# Altium PCB micro8051.PcbDoc (part 1 of 2)
Units mm, origin at the board's own origin, x right, y up, seen from the top; angles counter-clockwise.
Board outline 37 x 60 mm, 2 copper layers (Top Layer, Bottom Layer); 67 components, 71 nets, 314 pads, 101 vias.
Unrouted connection lines stored in the file: 2.
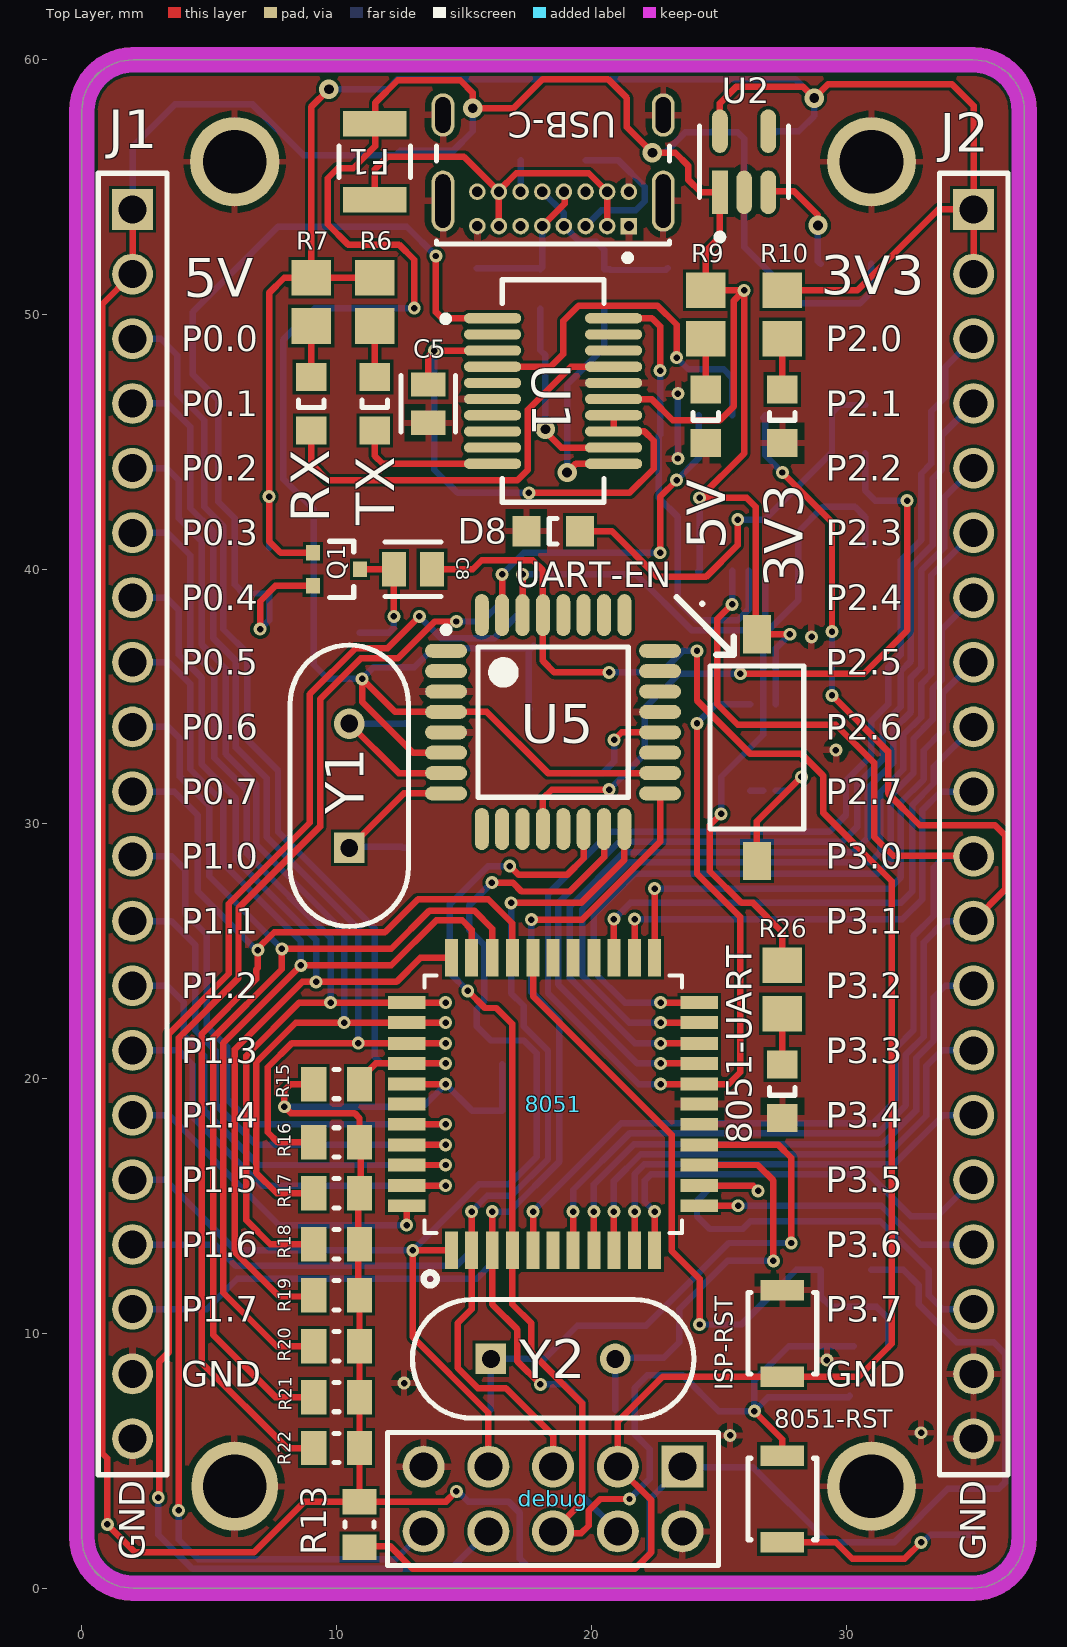
[diagram p0: Top Layer view]
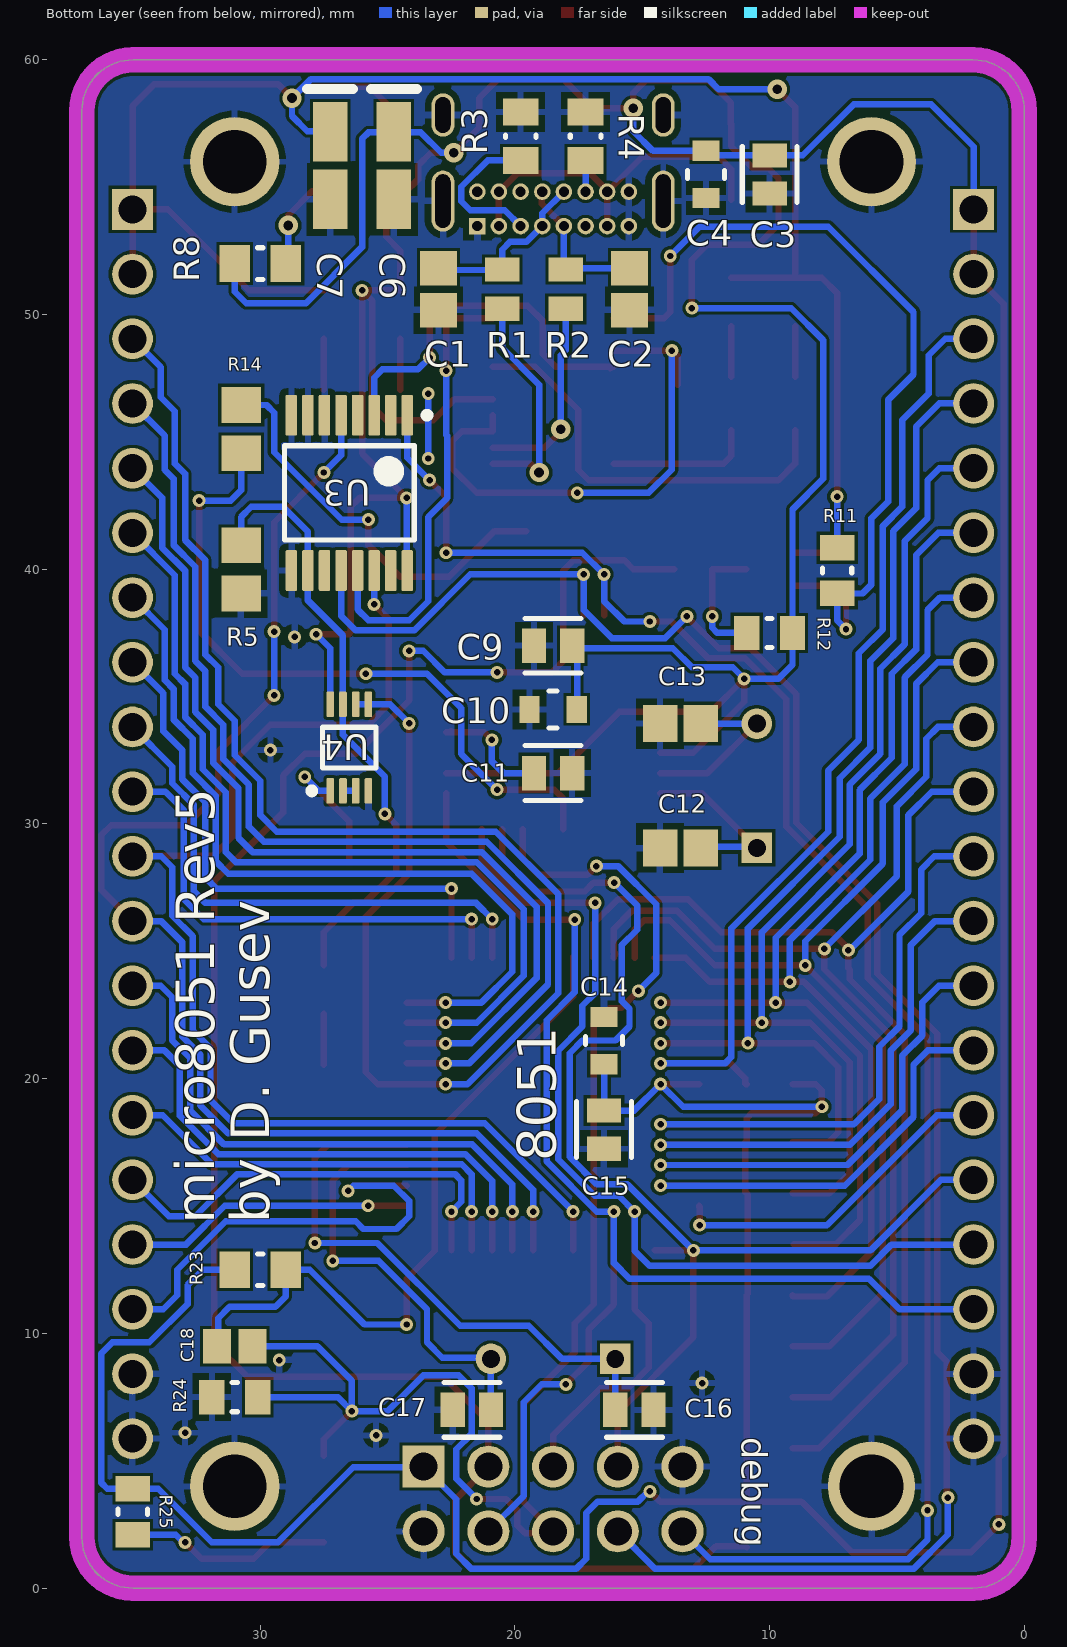
[diagram p1: Bottom Layer view, seen from below]
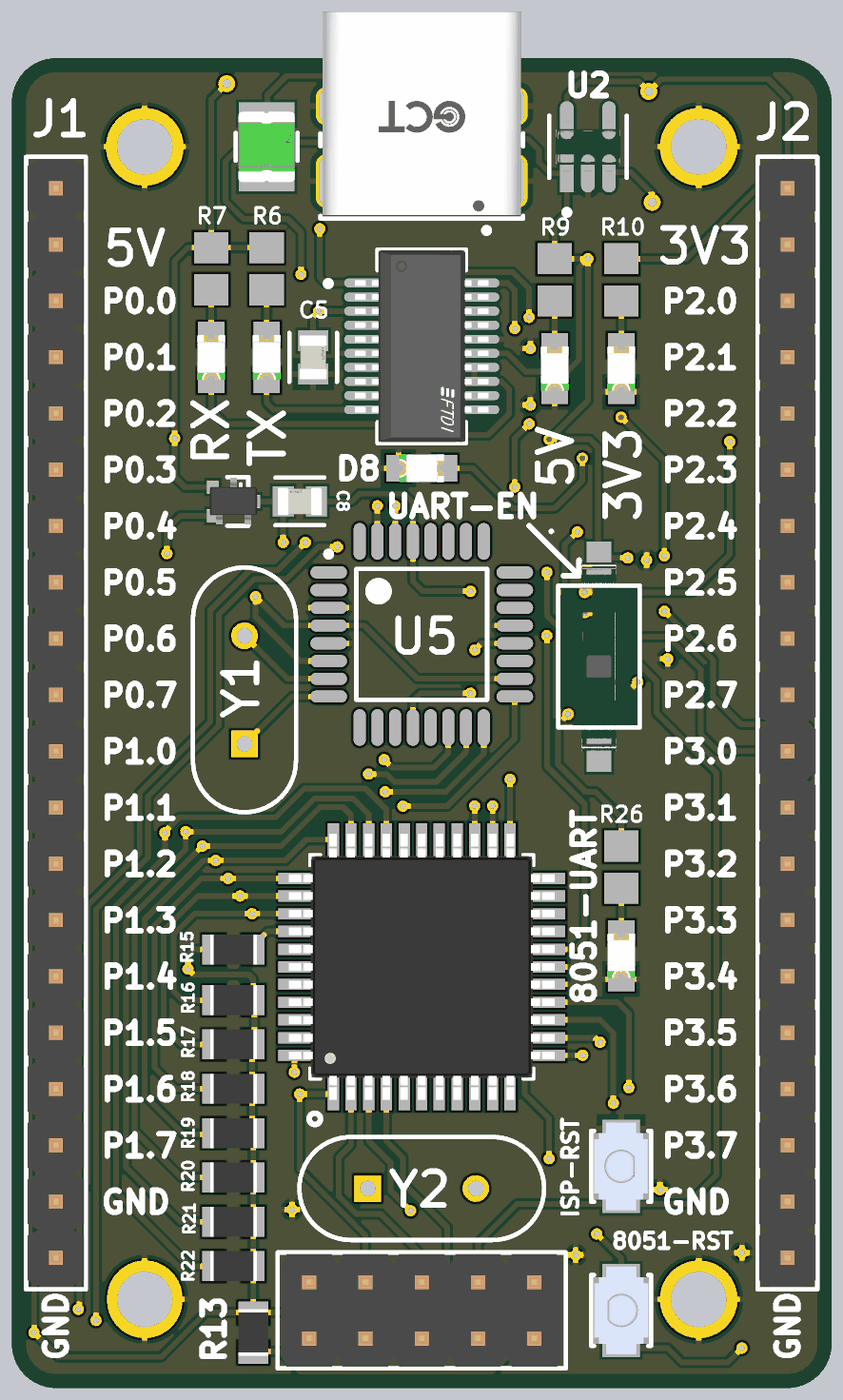
[diagram p2: 3D render of the assembled board from above, using the file's embedded part models]
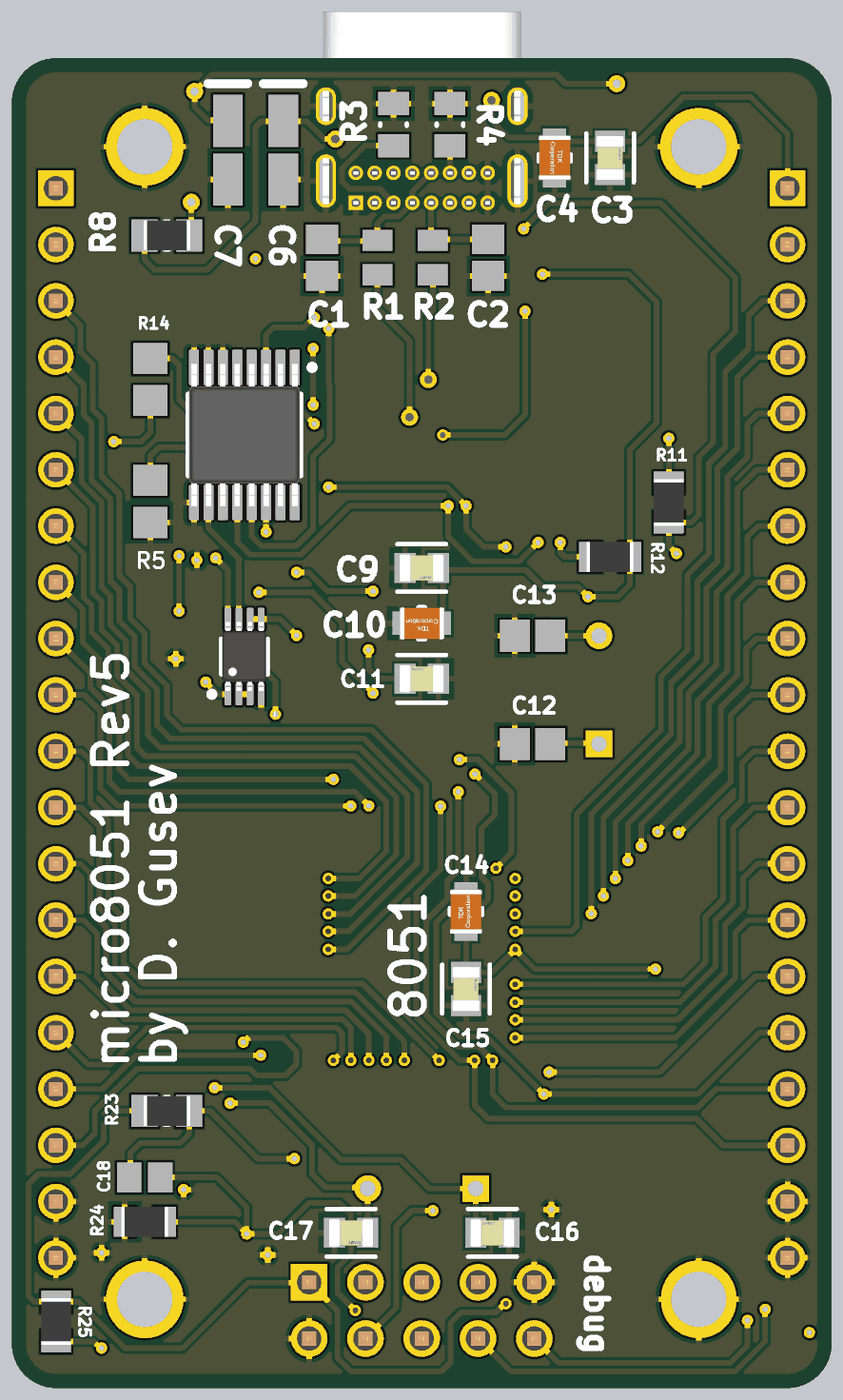
[diagram p3: 3D render of the assembled board from below, using the file's embedded part models]

## Layer stack, top to bottom
Top Solder: solder mask 0.0102, Solder Resist, Dk 3.5
Top Layer: signal copper 0.0356
Dielectric 1: dielectric 0.32, FR-4, Dk 4.8
Bottom Layer: signal copper 0.0356
Bottom Solder: solder mask 0.0102, Solder Resist, Dk 3.5

## Board outline
35,60 cw(c35,58) 37,58 37,2 cw(c35,2) 35,0 2,0 cw(c2,2) 0,2 0,58 cw(c2,58) 2,60

## Design rules (kind name [scope] priority, off if disabled: settings)
Clearance [All] p1: gap=0.127 ignorepadtopadclearanceinfootprint=FALSE except(0: Arc-Hole Track-Hole SMDPad-SMDPad SMDPad-Hole THPad-Hole Via-Hole Fill-Hole Poly-Hole Region-Hole Text-Hole)
PolygonConnect [All] p1: connectstyle=Relief reliefconductorwidth=0.254 reliefentries=4 polygonreliefangle="90 Angle" airgapwidth=0.254
RoutingVias [All] p1: holewidth=0.711 width=1.27 viastyle="Through Hole" minholewidth=0.711 minwidth=1.27 maxholewidth=0.711 maxwidth=1.27
SolderMaskExpansion [All] p1: expansion=0.102 istentingtop=FALSE
Width [All] p1: maxlimit=0.254 minlimit=0.254 preferedwidth=0.254
30 further rules are at their usual default settings.

## Classes and differential pairs
component class USB: 3V3 5V 8051-UART C1 C2 C3 C4 C5 C6 C7 C8 F1 Q1 R1 R2 R3 R4 R5 R6 R7 R8 R9 R10 R11 R12 R26 RX TX U1 U2 U3 U4 UART-EN USB-C
component class micro8051: 8051 8051-RST C14 C15 C16 C17 C18 J1 J2 R15 R16 R17 R18 R19 R20 R21 R22 R23 R24 R25 Y2
component class ISP: C9 C10 C11 C12 C13 D8 debug R13 R14 U5 Y1

## Components (designator, comment, footprint, x,y, rotation, side; value= is the part's Value field where it differs from the comment)
3V3 "150080GS75000" 0805_A 27.5,46 r90 top
5V "150080GS75000" 0805_A 24.5,46 r90 top
8051 "AT89S52-24AUR" AT89S52-24AUR 18.5,19 r90 top
8051-RST "B3U-1000P" FP-B3U-1000P-MFG 27.5,3.5 r90 top
8051-UART "150080SS75000" 0805_A 27.5,19.5 r90 top
C1 "47pF 50V 0805" CAPC2013X71X50NL20T25 23,51 r90 bottom
C2 "47pF 50V 0805" CAPC2013X71X50NL20T25 15.5,51 r90 bottom
C3 "100nF 50V 0805" FP-C0805C-DN-MFG 10,55.5 r270 bottom value="0.10 μF"
C4 "4.7uF 50V 0805" FP-C2012-125-MFG 12.5,55.5 r270 bottom value=4.7uF
C5 "100nF 50V 0805" FP-C0805C-DN-MFG 13.6,46.5 r270 top value="0.10 μF"
C6 "10uF 16V 1206" KEMT-A-3216-18-2_M 24.75,55.85 r270 bottom
C7 "10uF 16V 1206" KEMT-A-3216-18-2_M 27.25,55.85 r270 bottom
C8 "100nF 50V 0805" FP-C0805C-DN-MFG 13,40 r0 top value="0.10 μF"
C9 "100nF 50V 0805" FP-C0805C-DN-MFG 18.5,37 r0 bottom value="0.10 μF"
C10 "4.7uF 50V 0805" FP-C2012-125-MFG 18.5,34.5 r0 bottom value=4.7uF
C11 "100nF 50V 0805" FP-C0805C-DN-MFG 18.5,32 r180 bottom value="0.10 μF"
C12 "22pF 200V 0805" CAPC2013X115X51NL20T26 13.5,29.06 r180 bottom
C13 "22pF 200V 0805" CAPC2013X115X51NL20T26 13.5,33.94 r180 bottom
C14 "4.7uF 50V 0805" FP-C2012-125-MFG 16.5,21.5 r90 bottom value=4.7uF
C15 "100nF 50V 0805" FP-C0805C-DN-MFG 16.5,18 r270 bottom value="0.10 μF"
C16 "33pF 100V 0805" FP-C0805C-DN-MFG 15.31,7 r180 bottom value="33 pF"
C17 "33pF 100V 0805" FP-C0805C-DN-MFG 21.69,7 r0 bottom value="33 pF"
C18 "1uF 25V 0805" CAPC2013X140X50LL20T25 31,9.5 r180 bottom
D8 "150080BS75000" 0805_A 18.5,41.5 r0 top
debug "61301021121" 61301021121 18.5,3.5 r180 top
F1 "MICROSMD050F-2" FP-microSMD-MFG 11.5,56 r90 top value=0.25-0.9Ω
ISP-RST "B3U-1000P" FP-B3U-1000P-MFG 27.5,10 r270 top
J1 "61302011121" 61302011121 1.99,30 r270 top
J2 "61302011121" 61302011121 35.01,30 r270 top
Q1 "2N7002PW,115" FP-SOT323-MFG 10,40 r0 top
R1 "22R 1% 0805" RESC2013X70X40LL20T20 20.5,51 r270 bottom
R2 "22R 1% 0805" RESC2013X70X40LL20T20 18,51 r270 bottom
R3 "5K11 1% 0805" RESC0805(2012)_N 19.775,57 r270 bottom value="5110.00 Ohm"
R4 "5K11 1% 0805" RESC0805(2012)_N 17.225,57 r270 bottom value="5110.00 Ohm"
R5 "1K 1% 0805" RESC2013X60X40ML20T25 30.75,40 r270 bottom
R6 "1K 1% 0805" RESC2013X60X40ML20T25 11.5,50.5 r270 top
R7 "1K 1% 0805" RESC2013X60X40ML20T25 9,50.5 r270 top
R8 "100K 1% 0805" RESC2013X60X35ML10T20 30,52 r0 bottom
R9 "1K 1% 0805" RESC2013X60X40ML20T25 24.5,50 r90 top
R10 "1K 1% 0805" RESC2013X60X40ML20T25 27.5,50 r90 top
R11 "10K 1% 0805" RESC2013X60X35NL10T20 7.35,39.95 r90 bottom
R12 "10K 1% 0805" RESC2013X60X35NL10T20 10,37.5 r180 bottom
R13 "10K 1% 0805" RESC2013X60X35NL10T20 10.9,2.5 r90 top
R14 "1K 1% 0805" RESC2013X60X40ML20T25 30.75,45.5 r270 bottom
R15 "10K 1% 0805" RESC2013X60X35NL10T20 10,19.787 r180 top
R16 "10K 1% 0805" RESC2013X60X35NL10T20 10,17.5 r0 top
R17 "10K 1% 0805" RESC2013X60X35NL10T20 10,15.5 r0 top
R18 "10K 1% 0805" RESC2013X60X35NL10T20 10,13.5 r0 top
R19 "10K 1% 0805" RESC2013X60X35NL10T20 10,11.5 r0 top
R20 "10K 1% 0805" RESC2013X60X35NL10T20 10,9.5 r0 top
R21 "10K 1% 0805" RESC2013X60X35NL10T20 10,7.5 r0 top
R22 "10K 1% 0805" RESC2013X60X35NL10T20 10,5.5 r0 top
R23 "100R 1% 0805" RESC2013X60X35ML10T20 30,12.5 r0 bottom
R24 "10K 1% 0805" RESC2013X60X35NL10T20 31,7.5 r180 bottom
R25 "10K 1% 0805" RESC2013X60X35NL10T20 35,3 r90 bottom
R26 "1K 1% 0805" RESC2013X60X40ML20T25 27.5,23.5 r270 top
RX "150080YS75000" 0805_A 9,46.5 r90 top
TX "150080YS75000" 0805_A 11.5,46.5 r90 top
U1 "FT231XS-R" FP-SSOP-20-MFG 18.5,47 r0 top
U2 "AP2112K-3.3TRG1" FP-SOT25-IPC_A 26,56 r90 top
U3 "SN74LV4052APWR" PW0016A_M 26.5,43 r270 bottom
U4 "SN74LVC2G08DCUR" DCU0008A_M 26.5,33 r90 bottom
U5 "ATmega328P-AN" 32A_N 18.5,34 r0 top
UART-EN "A6S-1104-H" FP-A6S-1104-H-MFG 26.5,33 r180 top
USB-C "USB4085-GF-A" FP-USB4085-GF-A-MFG 18.5,57.5 r180 top
Y1 "49S/18PF" JPY-49S-18PF 10.5,31.5 r90 top
Y2 "49S/18PF" JPY-49S-18PF 18.5,9 r0 top

## Footprints (in the part's own frame and the unit in brackets; to place one, negate y for a bottom-side part, rotate by r counter-clockwise, add the part's x,y. Pads: shape width x height; smd on the part's side, far side on the other; paste and mask are expansions set on the pad)
32A_N [mm] "Thin QFP, 32-Leads, Body 7x7mm, Pitch 0.8mm, IPC Medium Density"
  oval 1.65x0.55 smd: 1(-4.2,2.8) 2(-4.2,2) 3(-4.2,1.2) 4(-4.2,0.4) 5(-4.2,-0.4) 6(-4.2,-1.2) 7(-4.2,-2) 8(-4.2,-2.8) 17(4.2,-2.8) 18(4.2,-2) 19(4.2,-1.2) 20(4.2,-0.4) 21(4.2,0.4) 22(4.2,1.2) 23(4.2,2) 24(4.2,2.8)
  oval 0.55x1.65 smd: 9(-2.8,-4.2) 10(-2,-4.2) 11(-1.2,-4.2) 12(-0.4,-4.2) 13(0.4,-4.2) 14(1.2,-4.2) 15(2,-4.2) 16(2.8,-4.2) 25(2.8,4.2) 26(2,4.2) 27(1.2,4.2) 28(0.4,4.2) 29(-0.4,4.2) 30(-1.2,4.2) 31(-2,4.2) 32(-2.8,4.2)
  silkscreen extent -4.32,-2.95 2.95,3.75, body extent -3.5,-3.5 3.5,3.5, height 1.2
0805_A [mm] "Chip LED, 2-Leads, Body 2.0x1.3mm, IPC Medium Density"
  rect 1.1x1.2 smd: 1(-1.05,0) 2(1.05,0)
  silkscreen extent -0.15,-0.5 0.15,0.5, body extent -1,-0.62 1,0.63, height 0.68
61301021121 [mm] "Pin Header, pitch 2.54 mm, THT, Vertical, dual row, 10p"
  rect 1.65x1.65 hole 1.1: 1(-5.08,-1.27)
  round 1.65 hole 1.1: 2(-5.08,1.27) 3(-2.54,-1.27) 4(-2.54,1.27) 5(0,-1.27) 6(0,1.27) 7(2.54,-1.27) 8(2.54,1.27) 9(5.08,-1.27) 10(5.08,1.27)
  silkscreen extent -6.5,-2.62 6.5,2.62, body extent -6.35,-2.54 6.35,2.54, height 8.59
61302011121 [mm] "Pin Header, pitch 2.54 mm, THT, Vertical, single row, 20p"
  rect 1.6x1.6 hole 1.1: 1(-24.13,0)
  round 1.6 hole 1.1: 2(-21.59,0) 3(-19.05,0) 4(-16.51,0) 5(-13.97,0) 6(-11.43,0) 7(-8.89,0) 8(-6.35,0) 9(-3.81,0) 10(-1.27,0) 11(1.27,0) 12(3.81,0) 13(6.35,0) 14(8.89,0) 15(11.43,0) 16(13.97,0) 17(16.51,0) 18(19.05,0) 19(21.59,0) 20(24.13,0)
  silkscreen extent -25.55,-1.35 25.55,1.35, body extent -25.4,-1.27 25.4,1.27, height 8.57
AT89S52-24AUR [mil]
  rect 58x20 smd: 1(-226,157) 2(-226,126) 3(-226,94) 4(-226,63) 5(-226,31) 6(-226,0) 7(-226,-31) 8(-226,-63) 9(-226,-94) 10(-226,-126) 11(-226,-157) 23(226,-157) 24(226,-126) 25(226,-94) 26(226,-63) 27(226,-31) 28(226,0) 29(226,31) 30(226,63) 31(226,94) 32(226,126) 33(226,157)
  rect 20x58 smd: 12(-157,-226) 13(-126,-226) 14(-94,-226) 15(-63,-226) 16(-31,-226) 17(0,-226) 18(31,-226) 19(63,-226) 20(94,-226) 21(126,-226) 22(157,-226) 34(157,226) 35(126,226) 36(94,226) 37(63,226) 38(31,226) 39(0,226) 40(-31,226) 41(-63,226) 42(-94,226) 43(-126,226) 44(-157,226)
  silkscreen extent -280,-199 199,200, body extent -236,-236 236,236, height 43
CAPC2013X71X50NL20T25 [mm] "Chip Capacitor, 2-Leads, Body 2.01x1.25mm, IPC Medium Density"
  rect 1.35x1.45 smd: 1(-0.825,0) 2(0.825,0)
  body extent -1.1,-0.72 1.11,0.72, height 0.71
CAPC2013X115X51NL20T26 [mm] "Chip Capacitor, 2-Leads, Body 2.01x1.25mm, IPC Medium Density"
  rect 1.35x1.45 smd: 1(-0.8,0) 2(0.8,0)
  body extent -1.11,-0.72 1.1,0.72, height 1.15
CAPC2013X140X50LL20T25 [mm] "Chip Capacitor, 2-Leads, Body 2.00x1.25mm, IPC High Density"
  rect 1.1x1.35 smd: 1(-0.7,0) 2(0.7,0)
  body extent -1.1,-0.72 1.1,0.72, height 1.4
DCU0008A_M [mm] "SOP, 8-Leads, Body 2.4x2.1mm, Pitch 0.5mm, IPC Low Density"
  rrect33% 1x0.3 smd: 1(-1.7,0.75) 2(-1.7,0.25) 3(-1.7,-0.25) 4(-1.7,-0.75) 5(1.7,-0.75) 6(1.7,-0.25) 7(1.7,0.25) 8(1.7,0.75)
  silkscreen extent -1.82,-1.05 0.8,1.6, body extent -1.56,-1 1.56,1, height 0.9
FP-A6S-1104-H-MFG [mm]
  rect 1.1x1.5 smd paste+0 mask+0: 1(0,-4.45) 2(0,4.45)
  silkscreen extent -1.84,-3.2 1.84,3.2, body extent -1.94,-5.3 1.94,5.3, height 0.25
FP-B3U-1000P-MFG [mm]
  rect 0.8x1.7 smd paste+0 mask+0: 1(-1.7,0) 2(1.7,0)
  silkscreen extent -1.6,-1.35 1.6,1.35, body extent -2.2,-1.45 2.2,1.45, height 0.25
FP-C0805C-DN-MFG [mm]
  rect 0.95x1.35 smd paste+0 mask+0: 1(-0.75,0) 2(0.75,0)
  silkscreen extent -1.1,-1.07 1.1,1.07, body extent -1,-0.63 1,0.62, height 0.88
FP-C2012-125-MFG [mm]
  rect 0.8x1.05 smd paste+0 mask+0: 1(-0.925,0) 2(0.925,0)
  silkscreen extent -0.15,-0.72 0.15,0.72, body extent -1.01,-0.72 0.99,0.73, height 1.45
FP-microSMD-MFG [mm]
  rect 1x2.5 smd paste+0 mask+0: 1(-1.5,0) 2(1.5,0)
  silkscreen extent -0.63,-1.4 0.63,1.4, body extent -2.1,-1.5 2.1,1.5, height 0.25
FP-SOT25-IPC_A [mm]
  rect 1.707x0.616 smd paste+0 mask+0: 1(-1.201,0.95)
  rrect100% 1.707x0.616 smd paste+0 mask+0: 2(-1.201,0) 3(-1.201,-0.95) 4(1.201,-0.95) 5(1.201,0.95)
  silkscreen extent -3.08,-1.75 1.4,1.75, body extent -2.55,-2 2.55,2, height 0.25
FP-SOT323-MFG [mm]
  rect 0.55x0.6 smd paste-1000 mask+0: 1(-0.925,0.65) 2(-0.925,-0.65) 3(0.925,0)
  silkscreen extent -0.28,-1.1 0.67,1.1, body extent -1.33,-1.2 1.33,1.2, height 0.25
FP-SSOP-20-MFG [mm]
  rrect100% 2.25x0.4 smd paste+0 mask+0: 1(-2.375,2.857) 2(-2.375,2.222) 3(-2.375,1.587) 4(-2.375,0.953) 5(-2.375,0.318) 6(-2.375,-0.318) 7(-2.375,-0.953) 8(-2.375,-1.587) 9(-2.375,-2.222) 10(-2.375,-2.857) 11(2.375,-2.857) 12(2.375,-2.222) 13(2.375,-1.587) 14(2.375,-0.953) 15(2.375,-0.318) 16(2.375,0.318) 17(2.375,0.953) 18(2.375,1.587) 19(2.375,2.222) 20(2.375,2.857)
  silkscreen extent -4.34,-4.37 1.99,4.37, body extent -3.6,-4.62 3.6,4.62, height 0.25
FP-USB4085-GF-A-MFG [mm]
  rrect100% 0.9x2.4 hole 2.1 slot 0.6 at 0 deg paste-1000 mask+0: 1(-4.325,3.045) 2(4.325,3.045)
  rrect100% 0.9x1.7 hole 1.4 slot 0.6 at 0 deg paste-1000 mask+0: 3(-4.325,-0.335) 4(4.325,-0.335)
  rect 0.65x0.65 hole 0.4 paste-1000 mask+0: A1(-2.975,4.025)
  round 0.65 hole 0.4 paste-1000 mask+0: A4(-2.125,4.025) A5(-1.275,4.025) A6(-0.425,4.025) A7(0.425,4.025) A8(1.275,4.025) A9(2.125,4.025) A12(2.975,4.025) B1(2.975,2.675) B4(2.125,2.675) B5(1.275,2.675) B6(0.425,2.675) B7(-0.425,2.675) B8(-1.275,2.675) B9(-2.125,2.675) B12(-2.975,2.675)
  silkscreen extent -4.57,0.89 4.57,5.39, body extent -4.87,-4.83 4.87,4.83, height 0.25
JPY-49S-18PF [mm] "THD, 2-Leads, Body 11.05x4.65mm, Pitch 4.88mm"
  rect 1.2x1.2 hole 0.7: 1(-2.44,0)
  round 1.2 hole 0.7: 2(2.44,0)
  silkscreen extent -5.53,-2.32 5.53,2.32, body extent -5.52,-2.32 5.53,2.33, height 3.5
KEMT-A-3216-18-2_M [mm] "Molded TAN Capacitor, 2-Leads, Body 3.4x1.8mm, IPC Low Density"
  rect 2.35x1.35 smd: 1(-1.325,0) 2(1.325,0)
  silkscreen extent -3,-0.9 -3,0.9, body extent -1.7,-0.9 1.7,0.9, height 1.8
PW0016A_M [mm] "SOP, 16-Leads, Body 5.1x4.5mm, Pitch 0.65mm, IPC Low Density"
  rrect22% 1.6x0.45 smd: 1(-3.05,2.275) 2(-3.05,1.625) 3(-3.05,0.975) 4(-3.05,0.325) 5(-3.05,-0.325) 6(-3.05,-0.975) 7(-3.05,-1.625) 8(-3.05,-2.275) 9(3.05,-2.275) 10(3.05,-1.625) 11(3.05,-0.975) 12(3.05,-0.325) 13(3.05,0.325) 14(3.05,0.975) 15(3.05,1.625) 16(3.05,2.275)
  silkscreen extent -3.17,-2.55 1.85,3.17, body extent -3.21,-2.5 3.21,2.5, height 1
RESC0805(2012)_N [mm] "Chip Resistor, Body 2.0x1.3mm, IPC Medium Density"
  rect 1.05x1.4 smd: 1(-0.95,0) 2(0.95,0)
  silkscreen extent -0.05,-0.6 0.05,0.6, body extent -1.1,-0.67 1.1,0.68, height 0.7
RESC2013X60X35ML10T20 [mm] "Chip Resistor, 2-Leads, Body 2.1x1.35mm, IPC Low Density"
  rect 1.2x1.45 smd: 1(-1,0) 2(1,0)
  silkscreen extent -0.1,-0.63 0.1,0.63, body extent -1.05,-0.68 1.05,0.67, height 0.6
RESC2013X60X35NL10T20 [mm] "Chip Resistor, 2-Leads, Body 2.1x1.35mm, IPC Medium Density"
  rect 1x1.35 smd: 1(-0.9,0) 2(0.9,0)
  silkscreen extent -0.1,-0.58 0.1,0.58, body extent -1.05,-0.68 1.05,0.67, height 0.6
RESC2013X60X40ML20T25 [mm] "Chip Resistor, 2-Leads, Body 2.00x1.25mm, IPC Low Density"
  rect 1.4x1.55 smd: 1(-0.95,0) 2(0.95,0)
  body extent -1.1,-0.72 1.1,0.72, height 0.6
RESC2013X70X40LL20T20 [mm] "Chip Resistor, 2-Leads, Body 2.00x1.25mm, IPC High Density"
  rect 0.95x1.35 smd: 1(-0.775,0) 2(0.775,0)
  body extent -1.1,-0.72 1.1,0.72, height 0.7

## Part data
3V3 5V: library part CMP-1426-00007-1, "SMD mono-color Chip LED, WL-SMCW, Green", Color=Green, Manufacturer="Wuerth Elektronik", ComponentLink1Description="Manufacturer URL", ComponentLink1URL=http://www.we-online.com, ComponentLink2Description=Datasheet, ComponentLink2URL=http://katalog.we-online.com/led/datasheet/150080GS75000.pdf, PackageReference=0805_A, PartNumber=150080GS75000
8051-RST ISP-RST: library part CMP-2100-03586-2, "SWITCH TACTILE SPST-NO 0.05A 12V", Contact Current Rating=50mA, Contact Resistance=100mR, Insulation Resistance=100MR, Max Operating Temperature=70°C, Max Voltage Rating (DC)=12V, Min Operating Temperature=-25°C, Operating Force=1.5N, Package Quantity=1, Ratings="Dust Proof", Actuator Length=0.4mm, Actuator Type=Standard, Contact Material=Silver, Current Rating=50mA, Depth=2.5mm, Electrical Life=200000Cycles, Height=1.2mm, Illumination Type=Non-Illuminated, Lead Free="Lead Free", Length=4mm, Max Current Rating=50mA, Mechanical Life=200000Cycles, Mount="Surface Mount", Orientation=Straight, Packaging="Tape and Reel", Switch Function=Off-Mom, Switch Travel=0.15mm, Termination=SMD/SMT, Throw Configuration=SPST, Voltage Rating (DC)=12V, Weight=0.000776oz, Width=3mm
8051-UART: library part CMP-1426-00010-1, "SMD mono-color Chip LED, WL-SMCW, Super Red", Color="Super Red", Manufacturer="Wuerth Elektronik", ComponentLink1Description="Manufacturer URL", ComponentLink1URL=http://www.we-online.com, ComponentLink2Description=Datasheet, ComponentLink2URL=http://katalog.we-online.com/led/datasheet/150080SS75000.pdf, PackageReference=0805_A, PartNumber=150080SS75000
C1 C2: library part CMP-2007-04508-1, Manufacturer="AVX Interconnect / Elco", Part Number=08055A470JAT2A
C3 C5 C8 C9 C11 C15: library part CMP-2007-00279-2, "CAP CER 0.1UF 50V X7R 0805", Capacitance="0.10 μF", Manufacturer=KEMET, Manufacturer Part Number=C0805C104K5RACTU, Package=C0805C-DN, Temperature="-55°C to +125°C", Temperature Characteristic=X7R, Temperature Coefficient=30ppm/°C, Temperature Range High=+125°C, Temperature Range Low=-55°C, Tolerance=0.1, Voltage Rating="50 V", Automotive=No, Category=Cap, ComponentLink2Description=Datasheet, ComponentLink2URL=https://content.kemet.com/datasheets/KEM_C1003_C0G_SMD.pdf, Device Class L1="Passive Components", Device Class L2=Capacitors, Device Class L3="Ceramic Capacitors", Digikey Description="CAP CER 0.1UF 50V X7R 0805", Height=0.88mm, Ipc Land Pattern Name=CAPC200125X78, Lead Free=Yes, Material=Ceramic, Mouser Description="Cap Ceramic 0.1uF 50V X7R 10% SMD 2.0 x 1.2 mm 125 C Paper T/R", Octopart=https://octopart.com/c0805c104k5ractu-kemet-143926, RoHS=TRUE
C4 C10 C14: library part CMP-08246-000007-1, "CAP CER 4.7UF 50V X5R 0805", Capacitance=4.7uF, Manufacturer="TDK Corporation", Manufacturer Part Number=C2012X5R1H475K125AB, Package=C2012-125, Temperature="-55°C to +85°C", Temperature Characteristic=X5R, Temperature Coefficient=15%, Temperature Range High=+85°C, Temperature Range Low=-55°C, Tolerance=10%, Voltage Rating=50V, Automotive=No, Category=Cap, ComponentLink2Description=Datasheet, ComponentLink2URL=https://product.tdk.com/info/en/catalog/datasheets/mlcc_commercial_general_en.pdf, Device Class L1="Passive Components", Device Class L2=Capacitors, Device Class L3="Ceramic Capacitors", Digikey Description="CAP CER 4.7UF 50V X5R 0805", Height=1.45mm, Lead Free=Yes, Material=Ceramic, Mouser Description="Multilayer Ceramic Capacitors MLCC - SMD/SMT 0805 4.7uF 50volts X5R 10%", Octopart=https://octopart.com/c2012x5r1h475k125ab-tdk-25947720, RoHS=TRUE
C6 C7: library part CMP-2000-05173-1, "Capacitor, Tantalum, 10 uF, +/- 10%, 16 V, -55 to 125 degC, 2-Pin SMD (1206), RoHS, Tape and Reel", Capacitance=10uF, Case Code=A, Case Style=Molded, Manufacturer=Kemet, Operating Temp Range=-55Cto125C, Package / Case=3216-18, Package Description="2-Pin Surface Mount Device, Body 3.2 x 1.6 mm", Package Reference=1206, Tolerance (+ or -)=10%, Voltage=16VDC, Construction=SMTChip, Datasheet URL=http://www.farnell.com/datasheets/1824869.pdf, Datasheet Version=Apr-14, DCL=1.6uA, DF=8%, ESR=7ohm, Failure Rate=NotRequired, Insulation=NotRequired, Lead Spacing (nom)=NotRequiredmm, Length W/Weld=NotRequiredmm, Manufacturer URL=http://www.kemet.com/, Mounting Style=SurfaceMount, Packaging=TapeandReel, Polarity=Polar, Product Depth (mm)=1.6mm, Product Diameter (mm)=NotRequiredmm, Product Height (mm)=1.6mm, Product Length (mm)=3.2mm, Seal=NotRequired, Seated Plane Height=NotRequiredmm, Wire Form=NotRequired
C12 C13: library part CMP-2007-04866-1, Manufacturer="AVX Interconnect / Elco", Part Number=08052U220GAT2A
C16 C17: library part CMP-1036-01444-3, "CAP CER 33PF 100V 5% NP0 0805", Capacitance="33 pF", Manufacturer=KEMET, Manufacturer Part Number=C0805C330J1GACTU, Package=C0805C-DN, Temperature="-55°C to +125°C", Temperature Characteristic=C0G, Temperature Coefficient=30ppm/°C, Temperature Range High=+125°C, Temperature Range Low=-55°C, Tolerance=0.05, Voltage Rating="100 V", Automotive=No, Category=Cap, ComponentLink2Description=Datasheet, ComponentLink2URL=https://content.kemet.com/datasheets/KEM_C1003_C0G_SMD.pdf, Device Class L1="Passive Components", Device Class L2=Capacitors, Device Class L3="Ceramic Capacitors", Digikey Description="CAP CER 33PF 100V 5% NP0 0805", Height=0.88mm, Ipc Land Pattern Name=CAPC200125X78, Lead Free=Yes, Material=Ceramic, Mouser Description="Cap Ceramic 33pF 100V C0G 5% SMD 0805 125°C Plastic T/R", Octopart=https://octopart.com/c0805c330j1gactu-kemet-2226180, RoHS=TRUE
C18: library part CMP-2007-03234-1, Manufacturer=Kemet, Part Number=C0805C105K3RACTU
D8: library part CMP-1426-00008-1, "SMD mono-color Chip LED, WL-SMCW, Blue", Color=Blue, Manufacturer="Wuerth Elektronik", ComponentLink1Description="Manufacturer URL", ComponentLink1URL=http://www.we-online.com, ComponentLink2Description=Datasheet, ComponentLink2URL=http://katalog.we-online.com/led/datasheet/150080BS75000.pdf, PackageReference=0805_A, PartNumber=150080BS75000
debug: library part CMP-1502-01084-1, "THT Vertical Pin Header WR-PHD, Pitch 2.54 mm, Dual Row, 10 pins", Contact Resistance=20mOhm, Manufacturer="Wurth Elektronik", Operating Temperature=-40to105degC, Rated Current=3A, Withstanding Voltage=500VAC, Working Voltage=250VAC, Datasheet URL=https://katalog.we-online.de/em/datasheet/6130xx21121.pdf, Gender=Male, Manufacturer URL=http://www.we-online.de, Mounting Technology=THT, Orientation=Vertical, Package Reference=61301021121, Packaging=Bag, Part Number=61301021121, Pin Number=10, Pitch=2.54mm, Publisher=WurthElektronik, Row Number=Dual
F1: library part CMP-08606-000015-1, "PTC RESET FUSE 13.2V 500MA 1210", Ambient Temperature Range High=+85°C, Ambient Temperature Range Low=-40°C, Current Rating=40A, Hold Current=0.5A, Manufacturer=Littelfuse, Package=microSMD, Resistance=0.25-0.9Ω, Temperature="to +85°C", Trip Current=1A, Voltage Rating=13.2V, Automotive=No, Category=Fuse, ComponentLink2Description=Datasheet, ComponentLink2URL=https://www.littelfuse.com/~/media/electronics/datasheets/resettable_ptcs/littelfuse_ptc_microsmd_datasheet.pdf.pdf, Device Class L1="Circuit Protection", Device Class L2="PTC Resettable Fuses", Device Class L3=unset, Digikey Description="PTC RESET FUSE 13.2V 500MA 1210", Height=0.62mm, Lead Free=Yes, Manufacturer Part Number=MICROSMD050F-2, Octopart=https://octopart.com/microsmd050f-2-littelfuse-74214982, RoHS=TRUE, Temperature Range High=+85°C, Trip Time=0.05s
J1 J2: library part CMP-1502-01102-1, "THT Vertical Pin Header WR-PHD, Pitch 2.54 mm, Single Row, 20 pins", Contact Resistance=20mOhm, Manufacturer="Wurth Elektronik", Operating Temperature=-40to105degC, Rated Current=3A, Withstanding Voltage=500VAC, Working Voltage=250VAC, Datasheet URL=https://katalog.we-online.de/em/datasheet/6130xx11121.pdf, Gender=Male, Manufacturer URL=http://www.we-online.de, Mounting Technology=THT, Orientation=Vertical, Package Reference=61302011121, Packaging=Bag, Part Number=61302011121, Pin Number=20, Pitch=2.54mm, Publisher=WurthElektronik, Row Number=Single
Q1: library part CMP-14409-000019-1, "MOSFET N-CH 60V 0.31A SOT323"
R1 R2: library part CMP-2001-00523-1, Manufacturer=Panasonic, Part Number=ERJ6ENF22R0V
R3 R4: library part CMP-1013-00591-1, "5K11 0.125W 1% 0805 (2012 Metric)  SMD", Case-EIA=0805, Case-Metric=2012, Power="0.125 W", Tolerance="1 %", Technology=SMT
R5 R6 R7 R9 R10 R14 R26: library part CMP-2001-00590-1, Manufacturer=Panasonic, Part Number=ERA6AEB123V
R8: library part CMP-2100-03668-1, "Chip Resistor, 100 KOhm, +/- 1%, 0.125 W, -55 to 155 degC, 0805 (2012 Metric), RoHS, Tape and Reel", Case Code (Imperial)=0805, Case Code (Metric)=2012, Manufacturer=Yageo, Max Operating Temperature=155degC, Max Power Dissipation=125mW, Min Operating Temperature=-55degC, Package Description="2-Pin Surface Mounted Device, Body 2 x 1.25 mm", Package Quantity=1, Resistance=100KOhm, Temperature Coefficient=100ppm/degreesC, Tolerance=1%, Voltage Rating=150V, Case/Package=0805, Composition=ThickFilm, Datasheet URL=http://www.yageo.com/NewPortal/yageodocoutput?fileName=/pdf/R-Chip/PYu-RC_Group_51_RoHS_L_5.pdf, Datasheet Version="Rev. 5, 10/2016", Depth=1.25mm, Height=0.024inch, Lead Free=LeadFree, Lead Pitch=0.4mm, Length=2mm, Manufacturer URL=http://www.yageo.com/, Military Standard=Not, Number of Pins=2, Number of Terminations=2, Package Reference=0805, Packaging=TapeandReel, Power Rating=125mW, REACH SVHC=Unknown, RoHSCompliant=true, Termination=SMD/SMT, Voltage Rating (DC)=150V, Width=0.049inch
R11 R12 R13 R15 R16 R17 R18 R19 R20 R21 R22 R24 R25: library part CMP-1659-00013-4, "Chip Resistor, 10 KOhm, +/- 1%, 0.125 W, -55 to 155 degC, 0805 (2012 Metric), RoHS, Tape and Reel", Manufacturer=Yageo, Max Operating Temperature="155 degC", Min Operating Temperature="-55 degC", Package Quantity=5000, Voltage Rating="150 V", ComponentLink1Description="Manufacturer URL", ComponentLink1URL=http://www.yageo.com/, ComponentLink2Description=Datasheet, ComponentLink2URL=http://www.yageo.com/documents/recent/PYu-RC_Group_51_RoHS_L_04.pdf, DatasheetVersion="Rev. 4, 02/2016", Height="0.5 mm", Length="2 mm", Mount="Surface Mount", Mounting Technology="Surface Mount", PackageDescription="2-Pin Surface Mounted Device, Body 2 x 1.25 mm", PackageReference=0805, Packaging="Tape and Reel", Pins=2, REACH SVHC="No SVHC", RoHSCompliant=true
R23: library part CMP-2100-03669-1, "Chip Resistor, 100 Ohm, +/-1%, 0.125 W, -55 to 155 degC, 0805 (2012 Metric), RoHS, Tape and Reel", Case Code (Imperial)=0805, Case Code (Metric)=2012, Manufacturer=Yageo, Max Operating Temperature=155degC, Max Power Dissipation=125mW, Min Operating Temperature=-55degC, Package Description="2-Pin Surface Mounted Device, Body 2 x 1.25 mm", Package Quantity=1, Resistance=100Ohm, Temperature Coefficient=100ppm/degreesC, Tolerance=1%, Voltage Rating=150V, Case/Package=0805, Composition=ThickFilm, Datasheet URL=http://www.yageo.com/NewPortal/yageodocoutput?fileName=/pdf/R-Chip/PYu-RC_Group_51_RoHS_L_5.pdf, Datasheet Version="Rev. 5, 10/2016", Depth=1.25mm, Height=0.024inch, Lead Free=LeadFree, Lead Pitch=0.4mm, Length=2mm, Manufacturer URL=http://www.yageo.com/, Military Standard=Not, Number of Pins=2, Number of Terminations=2, Package Reference=0805, Packaging=TapeandReel, Power Rating=125mW, REACH SVHC=Unknown, RoHSCompliant=true, Termination=SMD/SMT, Voltage Rating (DC)=150V, Width=0.049inch
RX TX: library part CMP-1426-00012-1, "SMD mono-color Chip LED, WL-SMCW, Yellow", Color=Yellow, Manufacturer="Wuerth Elektronik", ComponentLink1Description="Manufacturer URL", ComponentLink1URL=http://www.we-online.com, ComponentLink2Description=Datasheet, ComponentLink2URL=http://katalog.we-online.com/led/datasheet/150080YS75000.pdf, PackageReference=0805_A, PartNumber=150080YS75000
U1: library part CMP-0248-00024-3, "IC USB SERIAL FULL UART 20SSOP", Case/Package=SSOP, Max Operating Temperature=85°C, Max Supply Voltage=5.5V, Min Operating Temperature=-40°C, Min Supply Voltage=2.97V, Operating Supply Current=8mA, Operating Supply Voltage=5V, Package Quantity=2000, Data Rate=12Mbps, Height=0.059inch, Interface=UART, Length=8.74mm, Mount="Surface Mount", Number Of Channels=1, Number of Pins=20, Packaging="Tape and Reel", Radiation Hardening=No, Weight=0.016oz, Width=0.157inch
U2: library part CMP-12756-000035-1, "IC REG LINEAR 3.3V 600MA SOT25", Case/Package=SOT-23-5, Dropout Voltage=250mV, Max Input Voltage=6V, Max Operating Temperature=85°C, Max Output Current=600mA, Min Input Voltage=2.5V, Min Operating Temperature=-40°C, Output Voltage=3.3V, Package Quantity=1, Quiescent Current=55uA, Accuracy=1.5%, Height=1.3mm, Lead Free="Lead Free", Length=3.1mm, Mount="Surface Mount", Number Of Outputs=1, Number of Pins=5, Number of Regulators=1, Output Current=600mA, Output Type=Fixed, Packaging="Tape and Reel", Polarity=Positive, Width=1.7mm
U3: library part CMP-0802-00041-4, "Dual 4-Channel Analog Multiplexer/Demultiplexer, PW0016A, LARGE T&R", Generic Part Number=SN74LV4052A, Manufacturer="Texas Instruments", Operating Temperature Range(C)="-40 to 85", Rating=Catalog, Bandwidth(Max)(MHz)=50, Code_JEDEC=MO-153, Configuration="2 X 1：4 MUX", Crosstalk=Yes, DatasheetVersion=SCLS429J, Output Type=CMOS, PackageReference=PW0016A, PackageVersion=http://www.ti.com/lit/ml/mpds361/mpds361.pdf, Ron(Max)(Ohms)=75, Ron(Typ)(Ohms)=25, VCC(Max)(V)=5.5, VCC(Min)(V)=2
U4: library part CMP-0859-00670-3, "Dual 2-Input Positive-AND Gate, DCU0008A, LARGE T&R", F @ Nom Voltage(Max)(Mhz)=150, Generic Part Number=SN74LVC2G08, ICC @ Nom Voltage(Max)(mA)=0.01, Manufacturer="Texas Instruments", Operating Temperature Range(C)="-40 to 125,-40 to 85", Rating=Catalog, tpd @ Nom Voltage(Max)(ns)=9.8,5.8,5.3,4.8, Voltage(Nom)(V)=1.8,2.5,3.3,5, 3-State Output=No, Bits(#)=2, DatasheetVersion=SCES198M, Gate Type=AND, Input Type=CMOS/TTL, Logic=True, Output Drive (IOL/IOH)(Max)(mA)=32/-32, Output Type=CMOS, PackageReference=DCU0008A, Schmitt Trigger=No, Sub-Family="AND Gate", Technology Family=LVC, VCC(Max)(V)=5.5, VCC(Min)(V)=1.65
U5: library part CMP-0095-00620-1, "8-bit AVR Microcontroller, 32KB Flash, 1KB EEPROM, 2KB SRAM, 32-pin TQFP, Industrial Grade (-40°C to 105°C)", Code_JEDEC=MS-026-ABA, ComponentLink1Description="Manufacturer URL", ComponentLink1URL=http://www.atmel.com/, ComponentLink2Description="ATmega48A/48PA/88A/88PA/168A/168PA/328/328P Datasheet", ComponentLink2URL=http://www.atmel.com/dyn/resources/prod_documents/8271.pdf, ComponentLink3Description="ATmega48A/48PA/88A/88PA/168A/168PA/328/328P Summary", ComponentLink3URL=http://www.atmel.com/dyn/resources/prod_documents/8271S.pdf, DatasheetVersion="revD, May-2011", PackageDescription="32-Lead, 7x7x1.0 mm Body, 0.8mm Lead Pitch, Thin Profile Plastic Quad Flat Package (TQFP)", PackageReference=32A, PackageVersion="revC, Oct-2010"
UART-EN: library part CMP-08827-000005-1, "SWITCH SLIDE DIP SPST 25MA 24V", Ambient Temperature Range High=+70°C, Ambient Temperature Range Low=-20°C, Contact Current Rating=25mA, Contact Resistance=200mΩ, Manufacturer="Omron Electronics Inc-EMC Div", Package=0, Temperature="-20°C to +70°C", Voltage Rating DC=24V, Automotive=No, Category=Switch, ComponentLink2Description=Datasheet, ComponentLink2URL=https://omronfs.omron.com/en_US/ecb/products/pdf/en-a6s.pdf, Device Class L1=Electromechanical, Device Class L2=Switches, Device Class L3="DIP Switches", Digikey Description="SWITCH SLIDE DIP SPST 25MA 24V", Electromechanical Life=1000Cycles, Height=3.95mm, Lead Free=Yes, Manufacturer Part Number=A6S-1104-H, Mount="Surface Mount", Mouser Description="DIP Switches / SIP Switches Dip Switch", Number Of Circuits=1, Octopart=https://octopart.com/a6s-1104-h-omron-55410938, RoHS=TRUE, Standoff Height=0mm, Temperature Range High=+70°C, Temperature Range Low=-20°C, Throw Configuration=SPST-NO
USB-C: library part CMP-196119-000001-1, "CONN RCPT USB2.0 TYPEC 16POS", Current Rating=4.25A, Manufacturer="Global Connector Technology", Package=0, Temperature="-40°C to +85°C", Temperature Range High=+85°C, Temperature Range Low=-40°C, Voltage Rating=20V, Automotive=No, Category=Conn, ComponentLink2Description=Datasheet, ComponentLink2URL=https://gct.co/files/drawings/usb4085.pdf, Conn Orientation="Right Angle", Contact Material=Gold,Nickel, Device Class L1=Connectors, Device Class L2="USB Connectors", Device Class L3=unset, Digikey Description="CONN RCPT USB2.0 TYPEC 16POS", Height=3.66mm, Is Female=yes, Lead Free=Yes, Manufacturer Part Number=USB4085-GF-A, Number Of Contacts=16, Octopart=https://octopart.com/usb4085-gf-a-global+connector+technology-94773699, Pitch=0.85mm, RoHS=TRUE, Shielding=true, Usb Standard="USB 2.0"
Y1 Y2: library part CMP-2100-03581-1, "Crystal, 16 MHz, 18 pF, -20 to 70 degC, 2-Pin THD", Manufacturer="Shenzhen Jingpengyuan", Package Description="2-Pin Through Hole Device, Body 11.05 x 4.65 mm, Pitch 4.88 mm", Package Reference=49S-18PF, Datasheet URL=http://datasheet.octopart.com/49S-18PF-Xinhunjing-datasheet-30677139.pdf, Datasheet Version=41852.0, Manufacturer URL=http://www.chjiahui.com/

## Free pads (board coordinates)
  oval 3.4x3.5 hole 2.5: 34(6,4)
  round 3.5 hole 2.5: 34(6,56) 34(31,4) 34(31,56)

## Via types
v1: diameter 0.508, hole 0.254, Top Layer to Bottom Layer, 94 vias
v2: diameter 0.762, hole 0.381, Top Layer to Bottom Layer, 7 vias

## Nets (pads, with @x,y where several pads share a name; then routed paths per layer and width w, separated by ;. In a path a pad name is that pad's centre, name@x,y a point inside that pad or via, vN(x,y) a via of type N, cw(c..) or ccw(c..) an arc to the next point about the centre after c; other vN are vias at no path point)
8051-EA: 8051.29 C18.1 R23.1 | length 28.1
  Top Layer w0.254: 8051.29@17.713,24.787 8051.29 17.713,23.237 23.15,17.8 23.15,13.25 24.25,12.15 v1(24.25,10.35)
  Bottom Layer w0.254: v1(24.25,10.35) 25.9,10.35 28.05,12.5 R23.1 29,11.45 29.4,11.05 31.2,11.05 31.65,10.6 31.65,9.45 C18.1
8051-MISO: 8051.2 debug.5 J1.17 U5.16 | length 48.8
  Top Layer w0.254: v1(15.3,14.782) 8051.2 15.3,10.95 14.75,10.4 14.75,8.65 15.55,7.85 16.65,7.85 18.5,6 18.5,4.8 debug.5@18.47,4.77 ; v1(16.85,26.9) 19.6,26.9 21.3,28.6 U5.16 ; debug.5@18.45,4.75 debug.5@18.47,4.77 ; debug.5 debug.5@18.47,4.77
  Bottom Layer w0.254: J1.17 5.21,13.49 6.05,12.65 14.7,12.65 15.3,13.25 v1(15.3,14.782) 15.918,15.4 16.861,15.4 18.3,16.839 18.3,21.1 17.35,22.05 17.35,22.859 16.85,23.359 v1(16.85,26.9)
8051-MOSI: 8051.1 debug.7 J1.16 U5.15 | length 49.2
  Top Layer w0.254: 8051.1 v1(12.99,13.26) 12.99,9.86 15.96,6.89 15.96,4.81 15.95,4.8 15.96,4.79 debug.7 ; v1(16.1,27.7) 16.911,27.7 17.261,27.35 19.15,27.35 20.5,28.7 U5.15
  Bottom Layer w0.254: J1.16 3.27,16.03 6.04,13.26 v1(12.99,13.26) 15.58,15.85 16.772,15.85 17.85,16.928 17.85,21 17.35,21.5 16.05,21.5 15.5,22.05 15.5,22.75 15.8,23.05 15.8,25.25 15.2,25.85 15.2,26.8 v1(16.1,27.7)
8051-RST: 8051-RST.2 8051.4 C18.2 debug.6 R24.2 U5.14 | length 61.2
  Top Layer w0.254: v1(15.15,23.45) 15.824,22.776 16.274,22.776 16.9,22.15 8051.4 16.9,11.15 17.65,10.4 17.65,9.25 19.65,7.25 19.65,3.38 18.52,2.25 18.5,2.25 debug.6 18.58,2.15 19.6,2.15 19.9,2.45 19.9,3.05 20.35,3.5 v1(21.5,3.5) ; v1(16.8,28.35) 17.15,28 19.05,28 19.7,28.65 U5.14 ; v1(26.4,6.95) 27.5,5.85 8051-RST.2
  Bottom Layer w0.254: v1(15.15,23.45) 14.45,24.15 14.45,26.85 15.95,28.35 v1(16.8,28.35) ; v1(21.5,3.5) 22.3,4.3 22.3,5.45 21.7,6.05 21.7,7.85 22.2,8.35 23.6,8.35 25,6.95 v1(26.4,6.95) ; R24.2@30.15,7.55 R24.2 26.95,7.5 v1(26.4,6.95) ; C18.2 27.75,9.5 26.4,8.15 v1(26.4,6.95)
8051-SCK: 8051.3 debug.4 J1.18 U5.17 | length 53.7
  Top Layer w0.254: v1(16.112,14.782) 8051.3 16.112,11.138 17.1,10.15 17.1,8.9 v1(18,8) v1@18,7.95 ; v1(17.65,26.25) 19.65,26.25 22.7,29.3 U5.17
  Bottom Layer w0.254: J1.18 4.9,10.95 6.1,12.15 15.5,12.15 16.112,12.762 v1(16.112,14.782) 16.782,14.782 18.75,16.75 18.75,22.3 17.65,23.4 v1(17.65,26.25) ; v1(18,8) 18.95,8 19.65,7.3 19.65,3.62 debug.4 debug.4@21.07,2.23
+3V3: C7.1 J2.1 J2.2 Q1.1 R6.1 R7.1 R10.2 R11.2 U2.5 | length 75.3
  Top Layer w0.254: Q1.1 7.8,40.65 7.35,41.1 v1(7.35,42.85) 7.35,50.85 7.95,51.45 R7.1 ; v2(9.7,58.85) 9,58.15 R7.1 ; R6.1 R7.1 ; U2.5 25.05,58.3 25.7,58.95 28.3,58.95 v2(28.75,58.5) 29.3,59.05 34.15,59.05 35.01,58.19 J2.1 ; R10.2 30.45,50.95 33.63,54.13 J2.1 ; J2.2 J2.1
  Bottom Layer w0.254: R11.2 v1(7.35,42.85) ; v2(9.7,58.85) 12.004,58.85 12.4,59.246 28.004,59.246 v2(28.75,58.5) 28.75,57.8 28.15,57.2 27.3,57.2 27.25,57.15 C7.1
+5_USB_IN: F1.1 USB-C.A4 USB-C.A9 USB-C.B4 USB-C.B9 | length 14.5
  Top Layer w0.254: F1.1 11.5,55.7 12,56.2 15,56.2 USB-C.B4 ; USB-C.A9@16.3,53.5 ccw(c16.325,53.5) 16.325,53.475 USB-C.A9 USB-C.B4 ; USB-C.A4 USB-C.B9 19.9,55.55 17.05,55.55 16.375,54.875 USB-C.B4
+5V: 8051.38 C3.1 C4.1 C6.1 C9.1 C10.1 C14.1 C15.1 debug.1 F1.2 J1.1 J1.2 R8.2 R9.2 R12.2 R13.2 R15.2 R16.2 R17.2 R18.2 R19.2 R20.2 R21.2 R22.2 R23.2 R25.2 U1.15 U2.1 U3.16 U4.8 U5.4 U5.6 U5.18 UART-EN.1 | length 293.4
  Top Layer w0.254: J1.1 J1.2 0.8,50.4 0.8,5.3 1,5.1 v1(1,2.5) 2.1,1.4 6.75,1.4 8.75,3.4 R13.2 ; R15.2 8.187,19.787 7.95,19.55 v1(7.95,18.9) 8.2,18.65 10.7,18.65 10.9,18.45 10.9,17.55 10.95,17.5 10.95,15.55 R17.2 10.85,15.45 10.85,11.55 R19.2 R20.2 R21.2 R22.2 R13.2 ; F1.2 F1.2@11.513,57.487 ; 8051.38 v1(14.282,19.787) ; v1(13.05,50.25) 13.05,52.15 12.45,52.75 10.45,52.75 9.65,53.55 9.65,55.35 10.05,55.75 10.65,55.75 11.513,56.613 F1.2@11.513,57.487 ; U5.6 13,32.8 11,34.8 v1(11,35.7) 12.3,34.4 14.25,34.4 U5.4@14.3,34.35 ; U5.4 U5.4@14.3,34.35 ; v1(14.7,3.8) 14.3,3.4 R13.2 ; U1.15 22.368,46.682 23.2,45.85 25.05,45.85 25.6,46.4 25.6,50.55 v1(26,50.95) ; U5.18 18.3,32 15.9,34.4 14.35,34.4 U5.4@14.3,34.35 ; U2.1 25.05,53.05 24.5,52.5 R9.2 24.575,50.95 v1(26,50.95) ; U2.1 24.3,54.8 23.8,55.3 23.8,55.85 23.3,56.35 v2(22.4,56.35) 21.4,57.35 21.4,58.5 20.654,59.246 18.096,59.246 16.95,58.1 v2(15.35,58.1) 15.35,58.7 14.85,59.2 12.4,59.2 11.525,58.325 11.525,57.475 F1.2@11.513,57.487 ; v1(27.8,37.45) UART-EN.1 26.5,37.5 26.45,37.55 26.45,42.45 26.1,42.8 v1(24.25,42.8) 26,44.55 v1(26,50.95)
  Bottom Layer w0.254: J1.1 1.99,56.59 3.65,58.25 6.7,58.25 8.7,56.25 C3.1 10.1,56.25 12.325,56.25 C4.1 14.575,56.425 15.35,57.2 v2(15.35,58.1) ; v1(7.95,18.9) 13.394,18.9 v1(14.282,19.787) 15.319,18.75 C15.1 C14.1 ; v1(13.05,50.25) 9.15,50.25 7.9,49 7.9,43.55 9.1,42.35 R12.2 9.1,36.25 9.65,35.7 v1(11,35.7) 11.45,36.15 13.05,36.15 13.8,36.9 C9.1@17.55,36.9 ; v1(14.7,3.8) 14.769,3.8 15.169,3.4 16.75,3.4 17.2,2.95 17.2,1.154 17.6,0.754 21.704,0.754 22.3,1.35 22.3,3.49 debug.1 23.6,4.75 26.35,4.75 29.3,1.8 31.9,1.8 34,3.9 R25.2 36,3.9 36.246,4.146 36.246,9.204 35.8,9.65 34.35,9.65 32.85,11.15 32.85,11.9 32.25,12.5 R23.2 ; C10.1 17.55,34.5 17.55,36.8 C9.1 ; v2(22.4,56.35) 22.894,56.35 23.694,57.15 C6.1@24.75,57.15 ; U3.16@24.2,39.9 U3.16@24.225,39.925 ; U3.16 U3.16@24.225,39.925 ; v1(24.25,42.8) 24.25,39.95 U3.16@24.225,39.925 ; C6.1 C6.1@24.75,57.15 ; U4.8 27.25,36.9 v1(27.8,37.45) ; R8.2 31,50.9 30.55,50.45 28.2,50.45 26,52.65 26,56.9 25.75,57.15 C6.1@24.75,57.15
ARDUINO-DTR: C8.1 Q1.3 R12.1 | length 5.1
  Top Layer w0.254: Q1.3 C8.1 v1(12.25,38.15)
  Bottom Layer w0.254: R12.1 12.05,37.5 12.25,37.7 v1(12.25,38.15)
ARDUINO-RX: debug.8 U3.12 U5.30 | length 75.6
  Top Layer w0.254: v1(3,3.55) 3.044,3.594 3.044,8.894 3.419,9.269 3.419,21.769 5.769,24.119 5.769,26.869 8.95,30.05 8.95,35.1 10.75,36.9 12,36.9 v1(13.25,38.15) ; U5.30 v1(17.3,39.8)
  Bottom Layer w0.254: v1(3,3.55) 3,2.1 4.346,0.754 14.484,0.754 15.93,2.2 16,2.2 15.97,2.23 debug.8 ; v1(13.25,38.15) 14.1,37.3 16.2,37.3 17.3,38.4 v1(17.3,39.8) 17.35,39.8 17.4,39.75 17.4,39.783 17.417,39.8 21.75,39.8 23.95,37.6 26.25,37.6 26.825,38.175 U3.12
ARDUINO-TX: debug.10 U3.1 U5.31 | length 69.7
  Top Layer w0.254: v1(3.8,3.05) 3.75,3.1 3.8,3.15 3.8,21.6 6.15,23.95 6.15,26.7 9.35,29.9 9.35,34.9 10.95,36.5 12.4,36.5 13.85,37.95 v1(14.7,37.95) ; U5.31 v1(16.5,39.8) ; v1(22.7,40.65) 22.7,42.85 v1(23.35,43.5)
  Bottom Layer w0.254: v1(3.8,3.05) 3.8,1.9 4.565,1.135 12.325,1.135 debug.10 ; v1(14.7,37.95) 15.7,37.95 16.5,38.75 v1(16.5,39.8) 17.35,40.65 v1(22.7,40.65) ; v1(23.35,43.5) 24.225,44.375 U3.1
D8: R14.2 U5.12 | length 27.7
  Top Layer w0.254: U5.12 18.1,31 18.45,31.35 v1(20.7,31.35) ; v1(25.85,35.9) 30.7,35.9 32.4,37.6 v1(32.4,42.7)
  Bottom Layer w0.254: v1(20.7,31.35) 22.1,32.75 22.1,34.55 23.45,35.9 v1(25.85,35.9) ; R14.2 30.75,43.1 31.15,42.7 v1(32.4,42.7)
DTR: Q1.2 R11.1 U1.1 | length 33.8
  Top Layer w0.254: v1(7,37.65) 7,38.75 7.6,39.35 Q1.2 ; v1(13.9,52.3) 13.9,50.1 14.143,49.857 U1.1
  Bottom Layer w0.254: v1(7,37.65) 7.35,38 R11.1 6.35,39.05 6,39.4 6,42 5.35,42.65 5.35,46.65 4.35,47.65 4.35,50.1 7.7,53.45 12.75,53.45 v1(13.9,52.3)
GND: 3V3.1 5V.1 8051-UART.1 8051.16 8051.17 C1.1 C2.1 C3.2 C4.2 C5.2 C6.2 C7.2 C9.2 C10.2 C11.2 C12.1 C13.1 C14.2 C15.2 C16.2 C17.2 D8.1 debug.2 debug.9 ISP-RST.1 J1.19 J1.20 J2.19 J2.20 pad.34 R3.1 R4.1 R5.2 R24.1 U1.6 U1.16 U2.2 U3.6 U3.7 U3.8 U3.9 U4.4 U5.3 U5.5 U5.21 USB-C.1 USB-C.2 USB-C.3 USB-C.4 USB-C.A1 USB-C.A12 USB-C.B1 USB-C.B12 | length 2.6
  Bottom Layer w0.254: v1(23.4,44.35) 23.4,46.783 23.383,46.8 23.35,46.8 23.4,46.85 v1(23.4,46.9)
  other v1: 25.45,6 32.95,6.1 12.65,8.05 29.25,8.95 29.6,32.9 28.65,37.35
Net3V3_2: 3V3.2 R10.1 | length 2
  Top Layer w0.254: 3V3.2 R10.1
Net5V_2: 5V.2 R9.1 | length 2
  Top Layer w0.254: 5V.2 R9.1
Net8051-RST_1: 8051-RST.1 R25.1 | length 8.2
  Top Layer w0.254: 8051-RST.1 27.55,1.8 29.6,1.8 30.25,1.15 32.3,1.15 v1(32.95,1.8)
  Bottom Layer w0.254: v1(32.95,1.8) 33.019,1.8 33.319,2.1 R25.1
Net8051-UART_2: 8051-UART.2 R26.2 | length 2
  Top Layer w0.254: 8051-UART.2 R26.2
NetC5_1: C5.1 U1.3 U1.13 U1.14 | length 21.2
  Top Layer w0.254: C5.1 13.6,48.35 v1(13.838,48.587) U1.3 ; v1(17.55,43) 21.5,43 22.45,43.95 22.45,45.05 22.088,45.412 U1.13 U1.14
  Bottom Layer w0.254: v1(13.838,48.587) 13.838,43.912 14.75,43 v1(17.55,43)
NetC11_1: C11.1 U5.20 | length 4.7
  Top Layer w0.254: v1(20.9,33.3) 21.2,33.6 22.45,33.6 22.5,33.65 22.55,33.6 U5.20
  Bottom Layer w0.254: C11.1 20.45,32 20.9,32.45 v1(20.9,33.3)
NetC12_2: C12.2 U5.8 Y1.1 | length 6.9
  Top Layer w0.254: Y1.1 12.64,31.2 U5.8
  Bottom Layer w0.254: Y1.1 10.54,29.1 12.55,29.1 12.59,29.06 C12.2
NetC13_2: C13.2 U5.7 Y1.2 | length 6.8
  Top Layer w0.254: Y1.2 12.44,32 14.2,32 U5.7
  Bottom Layer w0.254: Y1.2 12.69,33.94 12.7,33.95 C13.2
NetD8_2: D8.2 R14.1 | length 16.2
  Top Layer w0.254: D8.2 20.8,41.5 22.6,39.7 24.5,39.7 25.75,40.95 v1(25.75,41.95)
  Bottom Layer w0.254: v1(25.75,41.95) 26.8,41.95 29.45,44.6 29.45,46.15 29.75,46.45 R14.1
NetR3_2: R3.2 USB-C.A5 | length 6.1
  Bottom Layer w0.254: USB-C.A5 19.8,53.45 19.8,53.5 20.4,54.1 21.75,54.1 22.1,54.45 22.1,55.019 21.069,56.05 R3.2
NetR4_2: R4.2 USB-C.B5 | length 1.2
  Bottom Layer w0.254: USB-C.B5 R4.2
NetR6_2: R6.2 TX.2 | length 2
  Top Layer w0.254: TX.2 R6.2
NetR7_2: R7.2 RX.2 | length 2
  Top Layer w0.254: RX.2 R7.2
NetR8_1: R8.1 U2.3 | length 4.3
  Top Layer w0.254: U2.3 26.999,54.799 27.05,54.85 27.95,54.85 28.9,53.9 v2(28.9,53.5)
  Bottom Layer w0.254: v2(28.9,53.5) 28.9,52.1 R8.1
NetU4_1: U4.1 UART-EN.2 | length 5.3
  Top Layer w0.254: UART-EN.2 26.5,30.1 v1(28.25,31.85)
  Bottom Layer w0.254: U4.1 27.7,31.3 v1(28.25,31.85)
NetU4_2: U4.2 U4.3 | length 0.5
  Bottom Layer w0.254: U4.3 U4.2
P0.0: 8051.37 J1.3 R15.1 | length 39.5
  Top Layer w0.254: R15.1 10.937,19.787 10.95,19.8 10.95,20.012 11.538,20.6 8051.37 v1(14.282,20.6)
  Bottom Layer w0.254: J1.3 3.1,49.05 3.75,48.4 3.75,46.9 4.8,45.85 4.8,42.45 5.55,41.7 5.55,37.65 6.5,36.7 6.5,33.3 7.7,32.1 7.7,29.7 11.5,25.9 11.5,20.85 11.75,20.6 v1(14.282,20.6)
P0.1: 8051.36 J1.4 R16.1 | length 41.5
  Top Layer w0.254: R16.1 7.7,17.5 7.3,17.9 7.3,20.45 8.25,21.4 v1(10.85,21.4) 10.856,21.394 12.753,21.394 8051.36 v1(14.282,21.388)
  Bottom Layer w0.254: J1.4 3.34,46.51 4.25,45.6 4.25,42.4 5.15,41.5 5.15,37.3 6.05,36.4 6.05,33 7.25,31.8 7.25,29.5 10.85,25.9 v1(10.85,21.4)
P0.2: 8051.35 J1.5 R17.1 | length 41
  Top Layer w0.254: R17.1 7.65,15.5 6.85,16.3 6.85,20.65 8.4,22.2 v1(10.3,22.2) 8051.35 v1(14.282,22.2)
  Bottom Layer w0.254: J1.5 3.33,43.97 3.8,43.5 3.8,42 4.7,41.1 4.7,37.05 5.65,36.1 5.65,32.75 6.85,31.55 6.85,29.2 10.3,25.75 v1(10.3,22.2)
P0.3: 8051.34 J1.6 R18.1 | length 40.6
  Top Layer w0.254: R18.1@9.05,13.5 7.4,13.5 6.45,14.45 6.45,20.9 8.538,22.988 v1(9.762,22.988) 8051.34 v1(14.282,22.988)
  Bottom Layer w0.254: J1.6 3.37,41.43 4.25,40.55 4.25,36.85 5.2,35.9 5.2,32.6 6.469,31.331 6.469,28.831 9.762,25.538 v1(9.762,22.988)
P0.4: 8051.33 J1.7 R19.1 | length 40.7
  Top Layer w0.254: R19.1 9.1,11.45 7.75,11.45 6,13.2 6,21.15 8.65,23.8 v1(9.2,23.8) 12.35,23.8 13.29,24.74 8051.33
  Bottom Layer w0.254: J1.7 3.31,38.89 3.8,38.4 3.8,36.65 4.7,35.75 4.7,32.35 6.05,31 6.05,28.6 9.2,25.45 v1(9.2,23.8)
P0.5: 8051.32 J1.8 R20.1 | length 42.7
  Top Layer w0.254: R20.1 7.65,9.5 5.55,11.6 5.55,21.4 v1(8.6,24.45) 12.15,24.45 13.919,26.219 14.931,26.219 15.3,25.85 8051.32
  Bottom Layer w0.254: J1.8 3.4,36.35 4.25,35.5 4.25,32.15 5.55,30.85 5.55,28.45 8.6,25.4 v1(8.6,24.45)
P0.6: 8051.31 J1.9 R21.1 | length 43.6
  Top Layer w0.254: R21.1 7.6,7.5 5.15,9.95 5.15,21.6 7.85,24.3 v1(7.85,25.1) 12.15,25.1 13.65,26.6 15.4,26.6 16.112,25.888 16.112,24.962 16.05,24.9 16.112,24.838 8051.31
  Bottom Layer w0.254: J1.9 3.39,33.81 3.85,33.35 3.85,31.85 5,30.7 5,27.95 v1(7.85,25.1)
P0.7: 8051.30 J1.10 R22.1 | length 44.8
  Top Layer w0.254: v1@6.85,25.05 7.55,25.75 11.9,25.75 13.2,27.05 15.95,27.05 16.9,26.1 16.9,24.75 8051.30 ; v1(6.908,25.05) 6.908,24.346 6.85,24.288 6.85,23.9 4.7,21.75 4.7,8.85 8.05,5.5 R22.1
  Bottom Layer w0.254: J1.10 3.63,31.27 4.55,30.35 4.55,27.35 6.85,25.05 v1(6.908,25.05)
P1.0: 8051.40 J1.11 | length 22.5
  Top Layer w0.254: 8051.40 v1(14.282,18.213)
  Bottom Layer w0.254: J1.11 3.53,28.73 4.05,28.21 4.05,26.5 4.9,25.65 4.9,22.05 5.7,21.25 5.7,19.2 6.687,18.213 v1(14.282,18.213)
P1.1: 8051.41 J1.12 | length 20.6
  Top Layer w0.254: 8051.41 v1(14.282,17.4)
  Bottom Layer w0.254: J1.12 3.51,26.19 4.45,25.25 4.45,21.9 5.25,21.1 5.25,19 6.85,17.4 v1(14.282,17.4)
P1.2: 8051.42 J1.13 | length 18.8
  Top Layer w0.254: 8051.42 v1(14.282,16.612)
  Bottom Layer w0.254: J1.13 3.35,23.65 4,23 4,21.7 4.8,20.9 4.8,18.75 6.938,16.612 14.238,16.612 14.25,16.6 14.262,16.612 v1(14.282,16.612)
P1.3: 8051.43 J1.14 | length 17.2
  Top Layer w0.254: 8051.43 v1(14.282,15.8)
  Bottom Layer w0.254: J1.14 3.79,21.11 4.35,20.55 4.35,18.5 7.05,15.8 v1(14.282,15.8)
P1.4: 8051.44 J1.15 | length 13.3
  Top Layer w0.254: v1(12.75,14.25) 12.75,14.95 12.76,14.96 8051.44
  Bottom Layer w0.254: J1.15 3.43,18.57 7.75,14.25 v1(12.75,14.25)
P2.0: 8051.18 J2.3 U4.5 U4.6 | length 63.7
  Top Layer w0.254: v1(22.718,19.787) 8051.18 25.387,19.787 25.85,20.25 25.85,26.35 24.15,28.05 v1(24.15,33.95)
  Bottom Layer w0.254: v1(22.718,19.787) 21.863,19.787 18.3,23.35 18.3,27.25 20.75,29.7 29.35,29.7 30,30.35 30,31.7 31,32.7 31,34.05 31.65,34.7 31.65,36.15 32.15,36.65 32.15,40.35 32.95,41.15 32.95,43.75 33.35,44.15 33.35,46.2 33.9,46.75 33.9,47.94 J2.3 ; v1(24.15,33.95) 24.9,34.7 U4.5 U4.6
P2.1: 8051.19 J2.4 | length 41.5
  Top Layer w0.254: v1(22.718,20.6) 8051.19
  Bottom Layer w0.254: v1(22.718,20.6) 21.8,20.6 18.7,23.7 18.7,26.9 21.1,29.3 29.85,29.3 30.45,29.9 30.45,31.55 31.45,32.55 31.45,33.9 32.15,34.6 32.15,36 32.55,36.4 32.55,40.1 33.4,40.95 33.4,43.55 33.75,43.9 33.75,45.25 J2.4
P2.2: 8051.20 J2.5 | length 38
  Top Layer w0.254: v1(22.718,21.388) 8051.20
  Bottom Layer w0.254: v1(22.718,21.388) 21.712,21.388 19.15,23.95 19.15,26.75 21.3,28.9 30.3,28.9 30.85,29.45 30.85,31.4 31.85,32.4 31.85,33.7 32.55,34.4 32.55,35.75 32.95,36.15 32.95,39.95 33.85,40.85 33.85,42.81 J2.5
P2.3: 8051.21 J2.6 | length 34.6
  Top Layer w0.254: v1(22.718,22.2) 8051.21
  Bottom Layer w0.254: v1(22.718,22.2) 21.5,22.2 19.65,24.05 19.65,26.65 21.5,28.5 30.95,28.5 31.35,28.9 31.35,31.25 32.25,32.15 32.25,33.5 32.95,34.2 32.95,35.5 33.35,35.9 33.35,39.77 J2.6
P2.4: 8051.22 J2.7 | length 31.1
  Top Layer w0.254: v1(22.718,22.988) 8051.22
  Bottom Layer w0.254: v1(22.718,22.988) 22.662,22.988 22.65,23 22.638,22.988 21.312,22.988 20.1,24.2 20.1,26.45 21.7,28.05 31.25,28.05 31.75,28.55 31.75,31.1 32.65,32 32.65,33.35 33.4,34.1 33.4,35.3 33.75,35.65 33.75,37.63 J2.7
P2.5: 8051.23 J2.8 | length 22.2
  Top Layer w0.254: 8051.23 v1(22.488,27.462)
  Bottom Layer w0.254: v1(22.488,27.462) 31.712,27.462 32.15,27.9 32.15,30.85 33.05,31.75 33.05,32.9 33.8,33.65 33.8,35.14 J2.8
P2.6: 8051.25 J2.9 | length 21.1
  Top Layer w0.254: 8051.25 v1(20.888,26.263)
  Bottom Layer w0.254: v1(20.888,26.263) 21.525,26.9 32.15,26.9 32.6,27.35 32.6,30.75 33.45,31.6 33.45,32.25 J2.9
P2.7: 8051.24 J2.10 | length 19
  Top Layer w0.254: 8051.24 v1(21.7,26.263)
  Bottom Layer w0.254: v1(21.7,26.263) 32.213,26.263 33,27.05 33,30.55 33.72,31.27 J2.10
P3.0: 8051.5 J2.11 U3.14 | length 48.9
  Top Layer w0.254: 8051.5 v1(17.713,14.782) ; v1(25.525,38.625) 25.5,38.65 25.5,38.6 24.95,38.05 24.95,34.7 25.75,33.9 29.6,33.9 31.1,32.4 31.1,29.5 31.85,28.75 34.99,28.75 J2.11
  Bottom Layer w0.254: v1(17.713,14.782) 17.713,14.813 17.75,14.85 17.781,14.85 21.181,18.25 31.05,18.25 31.95,19.15 31.95,21.2 32.65,21.9 32.65,25.6 33.45,26.4 33.45,28.3 33.88,28.73 J2.11 ; v1(25.525,38.625) U3.14
P3.1: 8051.7 J2.12 U3.5 | length 52
  Top Layer w0.254: 8051.7 v1(19.287,14.782) ; v1(27.5,43.8) 29.45,41.85 v1(29.45,37.55) ; v1@29.45,35.1 v1(29.45,35.05) 31.65,32.85 31.65,31.2 32.9,29.95 35.85,29.95 36.246,29.554 36.246,27.426 J2.12
  Bottom Layer w0.254: v1(19.287,14.782) 19.287,14.813 19.25,14.85 19.287,14.887 19.287,15.637 21.5,17.85 31.25,17.85 32.35,18.95 32.35,20.95 33.05,21.65 33.05,25.35 33.89,26.19 J2.12 ; U3.5 26.825,46.025 26.75,45.95 26.825,45.875 26.825,44.475 v1(27.5,43.8) ; v1(29.45,35.05) v1(29.45,37.55)
P3.2: 8051.8 J2.13 | length 22.9
  Top Layer w0.254: 8051.8 v1(20.1,14.782)
  Bottom Layer w0.254: v1(20.1,14.782) 20.1,15.85 21.67,17.42 31.42,17.42 32.75,18.75 32.75,20.8 33.45,21.5 33.45,23.2 33.9,23.65 J2.13
P3.3: 8051.9 J2.14 | length 20.1
  Top Layer w0.254: 8051.9 v1(20.888,14.782)
  Bottom Layer w0.254: v1(20.888,14.782) 20.888,15.988 21.939,17.039 31.639,17.039 33.15,18.55 33.15,20.5 33.76,21.11 J2.14
P3.4: 8051.10 J2.15 | length 17.3
  Top Layer w0.254: 8051.10 v1(21.7,14.782)
  Bottom Layer w0.254: v1(21.7,14.782) 21.668,14.782 21.65,14.8 21.7,14.85 21.7,16.25 22.088,16.638 31.888,16.638 33.82,18.57 J2.15
P3.5: 8051.11 J2.16 | length 17.2
  Top Layer w0.254: 8051.11 v1(22.488,14.782)
  Bottom Layer w0.254: v1(22.488,14.782) 22.1,15.17 22.1,16.007 22.35,16.257 30.893,16.257 32.55,14.6 33.58,14.6 J2.16
P3.6: 8051.12 J2.17 | length 11.4
  Top Layer w0.254: 8051.12 v1(25.763,15.012)
  Bottom Layer w0.254: v1(25.763,15.012) 31.388,15.012 32.91,13.49 J2.17
P3.7: 8051.13 J2.18 | length 18.9
  Top Layer w0.254: 8051.13 26.35,15.8 v1(26.55,15.6)
  Bottom Layer w0.254: v1(26.55,15.6) 26.35,15.8 24.75,15.8 24.15,15.2 24.15,14.6 24.65,14.1 25.95,14.1 26.25,14.4 31.35,14.4 33.25,12.5 33.25,11.5 33.8,10.95 J2.18
RESET: C8.2 debug.3 ISP-RST.2 R13.1 U5.29 | length 76.2
  Top Layer w0.254: R13.1 10.95,1.65 12.1,1.65 12.996,0.754 21.704,0.754 22.35,1.4 22.35,3.46 debug.3 21.04,6.54 22.8,8.3 ISP-RST.2 30.5,8.3 31.8,9.6 31.8,27.75 29.1,30.45 29.1,31.9 28.25,32.75 26.25,32.75 24.15,34.85 v1(24.15,36.8) ; C8.2 15.35,40 15.7,40.35 17.7,40.35 18.1,39.95 U5.29 18.1,36.4 18.55,35.95 v1(20.7,35.95)
  Bottom Layer w0.254: v1(20.7,35.95) 22.75,35.95 23.6,36.8 v1(24.15,36.8)
RX-LED: RX.1 U1.17 | length 16.7
  Top Layer w0.254: RX.1 9,44.15 9.65,43.5 17.1,43.5 17.512,43.913 17.512,46.263 19.202,47.952 U1.17
SERIAL-CHA: R5.1 R26.1 U3.10 U4.7 | length 24.2
  Top Layer w0.254: v1(25.1,30.4) 24.65,29.95 24.65,28.15 25.9,26.9 26.35,26.9 27.5,25.75 27.5,24.6 R26.1
  Bottom Layer w0.254: v1(25.1,30.4) 25.1,31.85 26.75,33.5 U4.7 26.75,37.4 28.125,38.775 U3.10 28.125,41.475 29.1,42.45 30.35,42.45 30.75,42.05 R5.1
TX-LED: TX.1 U1.10 | length 5.8
  Top Layer w0.254: TX.1 11.5,44.45 11.807,44.142 16.043,44.142 16.05,44.15 16.058,44.142 U1.10
UART-DOWN-RX: U1.20 U3.13 | length 17.9
  Top Layer w0.254: U1.20 22.381,49.857 22.7,49.539 v1(22.7,47.8)
  Bottom Layer w0.254: v1(22.7,47.8) 22.7,45.291 22.65,45.241 22.65,42.8 23.4,42.05 23.4,38.75 24.15,38 25.75,38 26.175,38.425 U3.13
UART-DOWN-TX: U1.4 U3.3 | length 14.6